# Altium PCB PCB1.PcbDoc
Units mil, origin at the board's own origin, x right, y up, seen from the top; angles counter-clockwise.
Board outline 6130 x 1505 mil, 2 copper layers (Top Layer, Bottom Layer); 51 components, 39 nets, 158 pads, 13 vias.
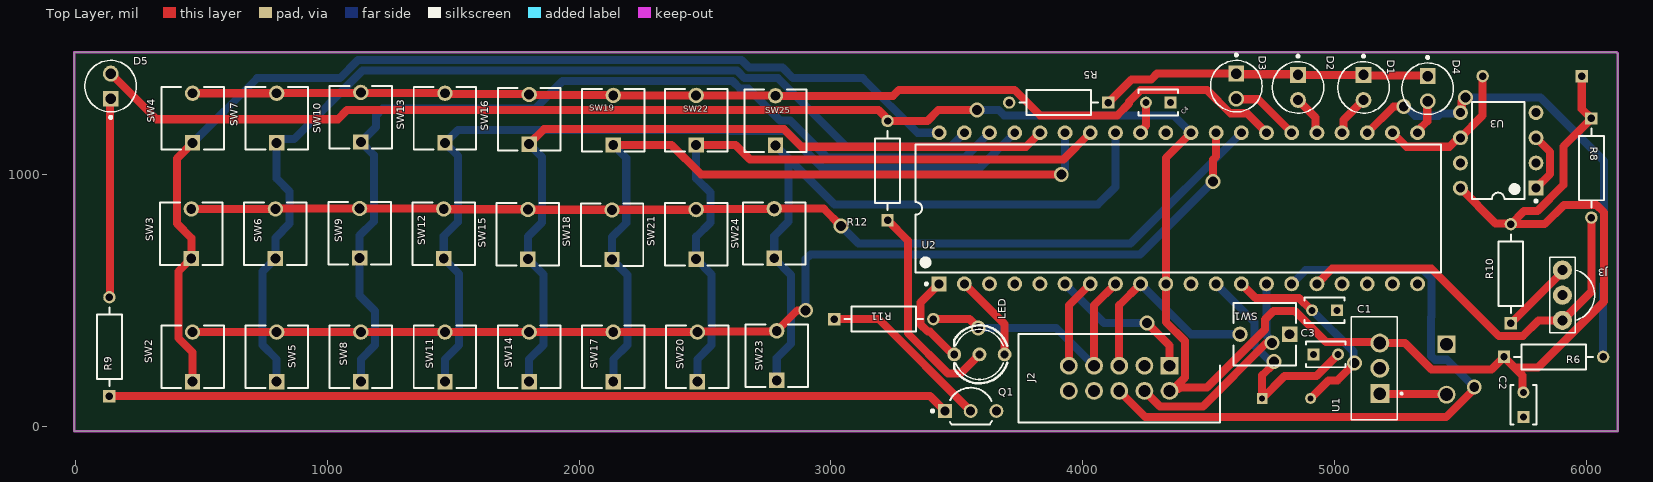
[diagram p0: Top Layer view]
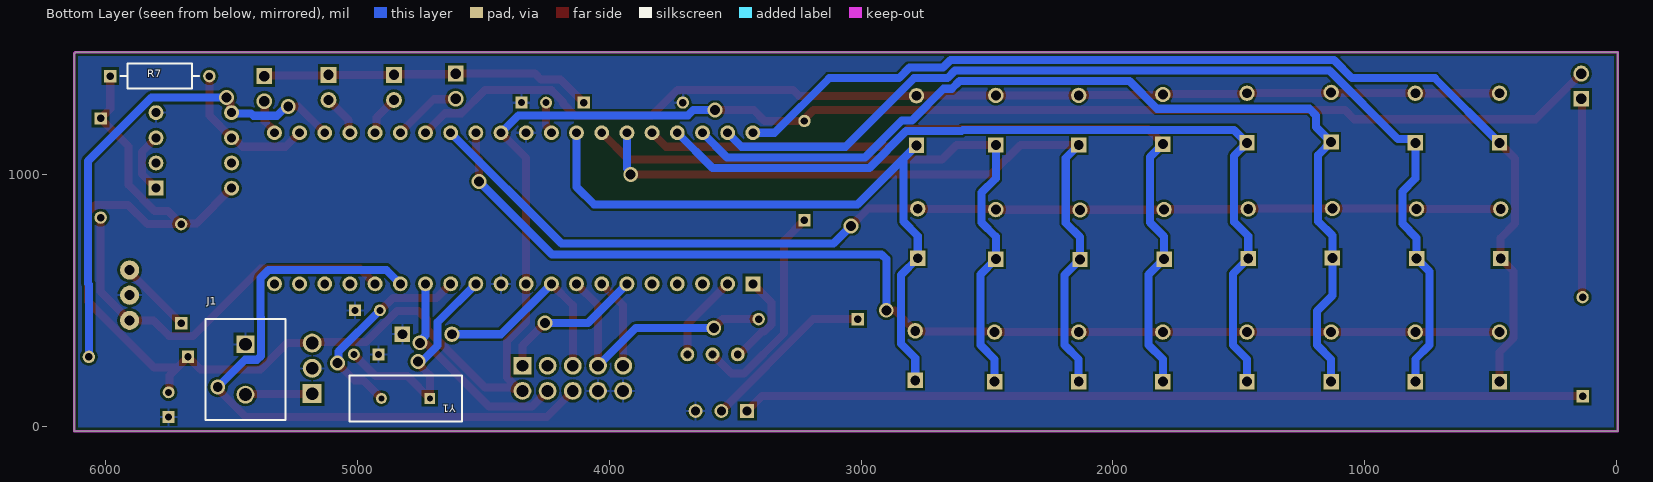
[diagram p1: Bottom Layer view, seen from below]
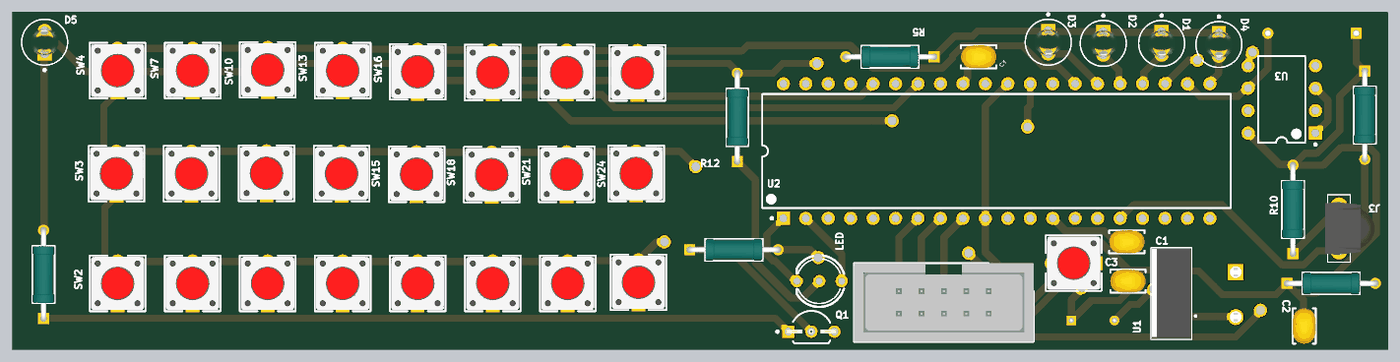
[diagram p2: 3D render of the assembled board from above, using the file's embedded part models]
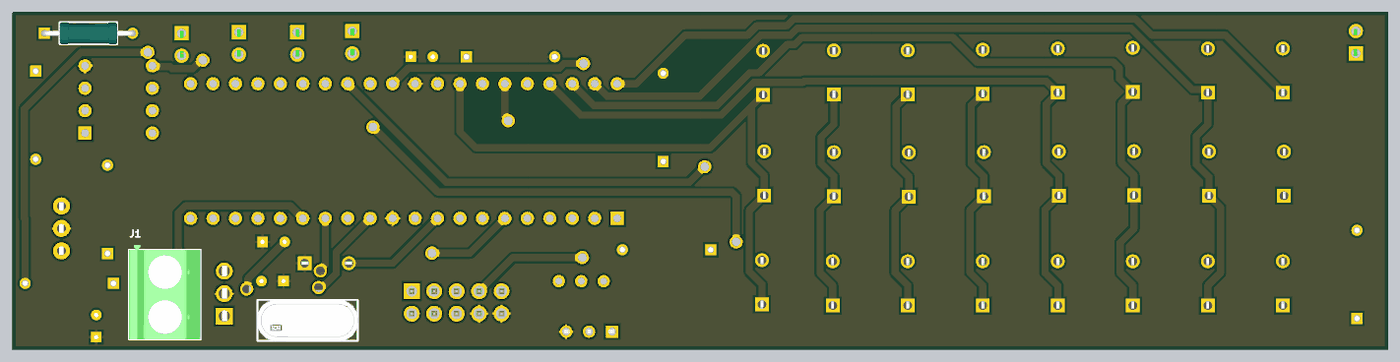
[diagram p3: 3D render of the assembled board from below, using the file's embedded part models]

## Layer stack, top to bottom
Top Solder: solder mask 0.4, Solder Resist, Dk 3.5
Top Layer: signal copper 1.4
Dielectric 1: dielectric 12.6, FR-4, Dk 4.8
Bottom Layer: signal copper 1.4
Bottom Solder: solder mask 0.4, Solder Resist, Dk 3.5

## Board outline
-5,-20 -5,1485 6120,1485 6125,1480 6125,-20

## Design rules (kind name [scope] priority, off if disabled: settings)
Clearance "My New Polygon" [InNamedPolygon('NONET_L01_P001')] p1: gap=10 ignorepadtopadclearanceinfootprint=FALSE
Clearance "Polygon NRule" [InNamedPolygon('NONET_L01_P000')] p2: gap=10 ignorepadtopadclearanceinfootprint=FALSE
Clearance [All] p3: gap=10 ignorepadtopadclearanceinfootprint=FALSE except(11.82: Arc-Via Track-Via; 15.8: Via-Via)
HoleSize [All] p1: absolutevalues=TRUE maxlimit=315 minlimit=7.87 maxpercent=80.000 minpercent=20.000
MinimumSolderMaskSliver [All] p1: minsoldermaskwidth=3
PolygonConnect [All] p1: connectstyle=Relief reliefconductorwidth=10 reliefentries=4 polygonreliefangle="90 Angle" airgapwidth=10
RoutingVias [All] p1: holewidth=23.7 width=47.3 viastyle="Through Hole" minholewidth=39.4 minwidth=59.1 maxholewidth=23.7 maxwidth=47.3
SilkToSilkClearance [All] p1: silktosilkclearance=3
SilkToSolderMaskClearance [IsPad] p1: minsilkscreentomaskgap=2 clearancetoexposedcopper=TRUE
SolderMaskExpansion [All] p1: expansion=4 istentingtop=FALSE
Width [All] p1: maxlimit=32 minlimit=16 preferedwidth=18 minimp=50.000000 maximp=50.000000 favimp=50.000000
26 further rules are at their usual default settings.

## Components (designator, comment, footprint, x,y, rotation, side; value= is the part's Value field where it differs from the comment)
C1 "K103K15X7RF5TL2" FP-K155L2-MFG 4960,460 r180 top
C2 "K103K15X7RF5TL2" FP-K155L2-MFG 5750,85 r90 top
C3 "K103K15X7RF5TL2" FP-K155L2-MFG 4965,285 r0 top
C4 "K103K15X7RF5TL2" FP-K155L2-MFG 4300,1285 r180 top
D1 "TLLG4401" FP-6_544-5255_01-4-MFG 5115,1345 r270 top
D2 "TLLG4401" FP-6_544-5255_01-4-MFG 4855,1345 r270 top
D3 "TLLG4401" FP-6_544-5255_01-4-MFG 4610,1350 r270 top
D4 "TLLG4401" FP-6_544-5255_01-4-MFG 5370,1340 r270 top
D5 "TLLG4401" FP-6_544-5255_01-4-MFG 140,1350 r90 top
J1 "1729128" PHOE-1729128-2_V 5445,225 r270 bottom
J2 "USBASP Connector" SHDR10W99P254_2X5_2032X889X927P 4345,240 r180 top
J3 "TSOP1838" TSOP1838 5905,520 r90 top
LED "L-59EGW-CA" L-59EGW-CA 3590,285 r90 top
Q1 "BC547BRL1G" ONSC-TO-92-3-29-11_AM_BL 3555,60 r0 top
R5 "MRS25000C1001FCT00" FP-MRS25-MFG 3905,1285 r180 top
R6 "MRS25000C1001FCT00" FP-MRS25-MFG 5870,275 r0 top
R7 "MRS25000C1001FCT00" FP-MRS25-MFG 5785,1390 r180 bottom
R8 "MRS25000C1001FCT00" FP-MRS25-MFG 6020,1025 r270 top
R9 "MRS25000C1001FCT00" FP-MRS25-MFG 135,315 r90 top
R10 "MRS25000C1001FCT00" FP-MRS25-MFG 5700,605 r90 top
R11 "MRS25000C1001FCT00" FP-MRS25-MFG 3210,425 r0 top
R12 "MRS25000C1001FCT00" FP-MRS25-MFG 3225,1015 r90 top
SW1 "EVQ-21505R" FP-EVQ-21505R-MFG 4723.43,365 r180 top
SW2 "EVQ-21505R" FP-EVQ-21505R-MFG 465,275 r90 top
SW3 "EVQ-21505R" FP-EVQ-21505R-MFG 460,764.21 r90 top
SW4 "EVQ-21505R" FP-EVQ-21505R-MFG 465,1223.43 r90 top
SW5 "EVQ-21505R" FP-EVQ-21505R-MFG 799.17,275 r90 top
SW6 "EVQ-21505R" FP-EVQ-21505R-MFG 794.17,764.21 r90 top
SW7 "EVQ-21505R" FP-EVQ-21505R-MFG 799.17,1223.43 r90 top
SW8 "EVQ-21505R" FP-EVQ-21505R-MFG 1133.33,275 r90 top
SW9 "EVQ-21505R" FP-EVQ-21505R-MFG 1128.33,765.93 r90 top
SW10 "EVQ-21505R" FP-EVQ-21505R-MFG 1133.33,1226.85 r90 top
SW11 "EVQ-21505R" FP-EVQ-21505R-MFG 1467.5,275 r90 top
SW12 "EVQ-21505R" FP-EVQ-21505R-MFG 1462.5,764.21 r90 top
SW13 "EVQ-21505R" FP-EVQ-21505R-MFG 1467.5,1223.43 r90 top
SW14 "EVQ-21505R" FP-EVQ-21505R-MFG 1801.67,275 r90 top
SW15 "EVQ-21505R" FP-EVQ-21505R-MFG 1796.67,761.71 r90 top
SW16 "EVQ-21505R" FP-EVQ-21505R-MFG 1801.67,1218.43 r90 top
SW17 "EVQ-21505R" FP-EVQ-21505R-MFG 2135.83,275 r90 top
SW18 "EVQ-21505R" FP-EVQ-21505R-MFG 2130.83,760 r90 top
SW19 "EVQ-21505R" FP-EVQ-21505R-MFG 2135.83,1215 r90 top
SW20 "EVQ-21505R" FP-EVQ-21505R-MFG 2470,275 r90 top
SW21 "EVQ-21505R" FP-EVQ-21505R-MFG 2465.01,761.57 r90 top
SW22 "EVQ-21505R" FP-EVQ-21505R-MFG 2465.01,1215 r90 top
SW23 "EVQ-21505R" FP-EVQ-21505R-MFG 2785.01,280 r90 top
SW24 "EVQ-21505R" FP-EVQ-21505R-MFG 2775.01,765 r90 top
SW25 "EVQ-21505R" FP-EVQ-21505R-MFG 2780.01,1213.43 r90 top
U1 "L7805CV" TO255P1040X460X1968-3 5180,129.21 r90 top
U2 "ATmega32A-PU" 40P6 4380,865 r90 top
U3 "24C01C-I/P" PDIP300-P8 5650,1095 r180 top
Y1 "ECS-80-20-4X" FP-ECS-80-20-4X-MFG 4808.94,110 r0 bottom

## Footprints (in the part's own frame and the unit in brackets; to place one, negate y for a bottom-side part, rotate by r counter-clockwise, add the part's x,y. Pads: shape width x height; smd on the part's side, far side on the other; paste and mask are expansions set on the pad)
40P6 [mm] "40-Pin Ceramic Dual In-Line Package (CerDIP)"
  rect 1.5x1.5 hole 0.9: 1(-7.62,24.13)
  round 1.5 hole 0.9: 2(-7.62,21.59) 3(-7.62,19.05) 4(-7.62,16.51) 5(-7.62,13.97) 6(-7.62,11.43) 7(-7.62,8.89) 8(-7.62,6.35) 9(-7.62,3.81) 10(-7.62,1.27) 11(-7.62,-1.27) 12(-7.62,-3.81) 13(-7.62,-6.35) 14(-7.62,-8.89) 15(-7.62,-11.43) 16(-7.62,-13.97) 17(-7.62,-16.51) 18(-7.62,-19.05) 19(-7.62,-21.59) 20(-7.62,-24.13) 21(7.62,-24.13) 22(7.62,-21.59) 23(7.62,-19.05) 24(7.62,-16.51) 25(7.62,-13.97) 26(7.62,-11.43) 27(7.62,-8.89) 28(7.62,-6.35) 29(7.62,-3.81) 30(7.62,-1.27) 31(7.62,1.27) 32(7.62,3.81) 33(7.62,6.35) 34(7.62,8.89) 35(7.62,11.43) 36(7.62,13.97) 37(7.62,16.51) 38(7.62,19.05) 39(7.62,21.59) 40(7.62,24.13)
  silkscreen extent -7.74,-26.5 6.45,26.5, body extent -7.05,-26.47 7.05,26.47, height 5.72
FP-6_544-5255_01-4-MFG [mm]
  rect 1.6x1.6 hole 1.05 paste-2539.97 mask+0: 1(-1.27,0)
  round 1.6 hole 1.05 paste-2539.97 mask+0: 2(1.27,0)
  silkscreen extent -3.27,-2.6 2.6,2.6, body extent -2.32,-2.32 2.32,2.32, height 0.25
FP-ECS-80-20-4X-MFG [mm]
  rect 1.1x1.1 hole 0.6 paste-2539.97 mask+0: 1(-2.44,0)
  round 1.1 hole 0.6 paste-2539.97 mask+0: 2(2.44,0)
  silkscreen extent -5.68,-2.33 5.68,2.33, body extent -5.68,-2.32 5.68,2.32, height 3.5
FP-EVQ-21505R-MFG [mm]
  rect 1.55x1.55 hole 1 paste-2539.97 mask+0: A(-2.5,0)
  round 1.55 hole 1 paste-2539.97 mask+0: B(2.5,0)
  silkscreen extent -3.15,-3.15 3.15,3.15, body extent -3.37,-3.25 3.37,3.25, height 0.25
FP-K155L2-MFG [mm]
  rect 1.2x1.2 hole 0.7 paste-2539.97 mask+0: 1(-1.25,0)
  round 1.2 hole 0.7 paste-2539.97 mask+0: 2(1.25,0)
  silkscreen extent -2,-1.3 2,1.3, body extent -2.1,-1.4 2.1,1.4, height 0.25
FP-MRS25-MFG [mm]
  rect 1.25x1.25 hole 0.75 paste-2539.97 mask+0: 1(-5,0)
  round 1.25 hole 0.75 paste-2539.97 mask+0: 2(5,0)
  silkscreen extent -3.97,-1.25 3.98,1.25, body extent -5.72,-1.35 5.72,1.35, height 0.25
L-59EGW-CA [mm]
  round 1.4 hole 0.8: 1(0,2.54) 2(0,0) 3(0,-2.54)
  silkscreen extent -2.92,-2.8 2.92,2.54
ONSC-TO-92-3-29-11_AM_BL [mm] "TO, 3-Leads, Body Dia 4.7mm, Pitch 2.6mm"
  rect 1.4x1.4 hole 0.9: 1(-2.6,0)
  round 1.4 hole 0.9: 2(0,0) 3(2.6,0)
  silkscreen extent -3.97,-1.34 2.13,2.35, body extent -2.84,-1.34 2.84,2.35, height 5.33
PDIP300-P8 [mm] "8-Pin Plastic Dual In-Line Package (PDIP)"
  rect 1.5x1.5 hole 0.9: 1(-3.81,3.81)
  round 1.5 hole 0.9: 2(-3.81,1.27) 3(-3.81,-1.27) 4(-3.81,-3.81) 5(3.81,-3.81) 6(3.81,-1.27) 7(3.81,1.27) 8(3.81,3.81)
  silkscreen extent -3.94,-4.9 2.65,5.23, body extent -3.55,-4.9 3.55,4.9, height 4.32
PHOE-1729128-2_V [mm] "Receptacle, 2-Leads, Body 8.1x10.16mm, Pitch 5.08mm"
  rect 1.8x1.8 hole 1.3: 1(-2.54,0)
  round 1.8 hole 1.3: 2(2.54,0)
  silkscreen extent -5.08,-4.05 5.08,4.05, body extent -5.65,-4.05 5.08,4.05, height 10.01
SHDR10W99P254_2X5_2032X889X927P [mm]
  rect 1.8x1.8 hole 1.2: 1(0,0)
  round 1.8 hole 1.2: 2(0,2.54) 3(2.54,0) 4(2.54,2.54) 5(5.08,0) 6(5.08,2.54) 7(7.62,0) 8(7.62,2.54) 9(10.16,0) 10(10.16,2.54)
  silkscreen extent -5.08,-3.17 15.24,5.72, body extent -5.08,-3.18 15.24,5.72, height 9.27
TO255P1040X460X1968-3 [mm]
  rect 1.91x1.91 / inner round 1.91 / far side rect 1.91x1.91 hole 1.27: 1(0,0)
  round 1.91 hole 1.27: 2(2.55,0) 3(5.1,0)
  silkscreen extent -2.65,-2.29 7.75,2.86, body extent -2.35,-1.71 7.62,2.73, height 19.68
TSOP1838 [mil]
  round 76 hole 39.37: 1(-100,0) 2(0,0) 3(100,0)
  silkscreen extent -150,-128 150,50, body extent -118,-159 118,61, height 404

## Part data
C1 C3: library part CMP-00030-39474934-1, "K103K15X7RF5TL2 Multilayer Ceramic Capacitor, 0.01 uF, 50 V, ± 10%, X7R, Radial Leaded (10P)", Capacitance=10nF, Case/Package=Dipped, Dielectric=X7R, Dielectric Material=Ceramic, Max Operating Temperature=125°C, Min Operating Temperature=-55°C, Tolerance=10%, Voltage=50V, Depth=2.6mm, Diameter=500µm, Height=4mm, Height - Seated (Max)=5.588mm, Lead Diameter=500µm, Lead Free="Lead Free", Lead Length=30mm, Lead Pitch=2.5mm, Lead/Base Style=Straight, Length=4mm, Mount="PCB, Through Hole", NexarPartId=39474934, Number of Pins=2, Packaging="Cut Tape", Radiation Hardening=No, REACH SVHC=Unknown, RoHS=Compliant, Schedule B=8532240060, Termination=Radial, Thickness=2.6mm, Voltage Rating=50V, Voltage Rating (DC)=50V, Weight=160.004709mg, Width=2.5mm
C2 C4: library part CMP-00030-39474934-1, "K103K15X7RF5TL2 Multilayer Ceramic Capacitor, 0.01 uF, 50 V, ± 10%, X7R, Radial Leaded", Capacitance=10nF, Case/Package=Dipped, Dielectric=X7R, Dielectric Material=Ceramic, Max Operating Temperature=125°C, Min Operating Temperature=-55°C, Tolerance=10%, Voltage=50V, Depth=2.6mm, Diameter=500µm, Height=4mm, Height - Seated (Max)=5.588mm, Lead Diameter=500µm, Lead Free="Lead Free", Lead Length=30mm, Lead Pitch=2.5mm, Lead/Base Style=Straight, Length=4mm, Mount="PCB, Through Hole", NexarPartId=39474934, Number of Pins=2, Packaging="Cut Tape", Radiation Hardening=No, REACH SVHC=Unknown, RoHS=Compliant, Schedule B=8532240060, Termination=Radial, Thickness=2.6mm, Voltage Rating=50V, Voltage Rating (DC)=50V, Weight=160.004709mg, Width=2.5mm
D1 D2 D3 D4 D5: library part CMP-00030-39390728-1, "TLLG4401 LED, Green, 2mcd, 3mmDia., T-1, +/-25deg, 565nm, 7mA, 1.9V Vf, 20V Vr, 20mW, -40", Ambient Temperature Range High=100°C, Case/Package=Radial, Color=Green, Forward Current=2mA, Forward Voltage=1.9V, Min Operating Temperature=-40°C, Power Dissipation=20mW, Reverse Voltage=6V, Voltage Rating (DC)=2.4V, Depth=3.2mm, Dominant Wavelength=575nm, Height=4.5mm, Illumination Color=Green, Lead Free="Lead Free", Lead Length=23mm, Length=3.2mm, Lens Color=Green, Lens Style="Circular, Colored, Diffused, Dome, Round, Tinted", Lens Transparency=Diffused, Luminous Intensity=2mcd, Max Junction Temperature (Tj)=100°C, Max Operating Temperature=100°C, Mount="Through Hole", NexarPartId=39390728, Number of Elements=1, Number of LEDs=1, Number of Pins=2, Packaging=Bulk, Peak Wavelength=565nm, Radiation Hardening=No, REACH SVHC=Unknown, RoHS=Compliant, Schedule B="8541402000, 8541402000", Test Current=2mA, Viewing Angle=25°, Wavelength=575nm
J1: library part CMP-2000-05815-1, "Header of  Input Batt", Current Rating=13500mA, Manufacturer="Phoenix Contact", Package Description="2-Pin Through Hole Device, Body 8.1 x 10.16 mm, Pitch 5.08 mm", Package Reference=1729128-2, Package Version=03/2015, Voltage Rating=400V, Datasheet URL=https://datasheet.ciiva.com/16046/1729128-16046181.pdf, Datasheet Version=12/2013, Manufacturer URL=http://www.phoenixcontact.com/, Mounting Technology=ThroughHole, No. of Positions=2, No. of Rows=1, Orientation=Horizontal, Package URL=https://www.phoenixcontact.com/online/portal/pi/pxc/product_detail_page/!ut/p/b1/3VdJjqNKFDxLH8AFycySyWY2ozFsEPOMMQaDOX1XedGL_1Vdm5YXJleknhSKeBkvI6EA8ncAo3AYoDhBQGco6KN7VURTdemj9us_IEKEZo_YHiPAEWEFmDGOHMORkqKYCORBZxgL7ZoaZYcbFFUZ3fqxSY6GOuxydWUuHqz1ynmMFygu583Bob0Ewr6Sd_l-5m-kAueHiB0jpRwZwe58wwtkpxtMYd_LmGcDRU02dRNEyWt6Y2ti5pSyJ_reIkzIulrqApdnbT11V5jnCKbYNCvhEM1MCpPByat_X379-iThf08CI5GfOPqfBeS3BRoBOdD55AKVv0iLwCMq-2BrzXWSGRH7pUGD9uwXQjiph3xL0DKQwdGa0JImiIOmBNOestqgwTHSSs2oOep-78apyXQBvNi8ZLaFjvjWvcaUEBu0MC6Wbe-d6mB0FAebo2lUWinqYaZs5DAYzV0RP9yitUjnGJ0iI9xhZkT42OCQNUJJhkgWINNQLP2JFP6OpMg3JCVg70jqHT0lvKOnhHf0lPuOnnLf0VPuWx6_dxwUIvwk5WMkT0kLL1mh61l2yZVSzG3pYV_bqo-mj6uMKwKwdnnW8Jh5RTOJzMOA5c-eJDaZQw4mTMPH02PvS_ZAqNVjVTo2WyYLkwH_KU1mmmG5kjRhDqPXLwwVHvVOjCM60-fpXvTDfMGW1PVFVS1r4e4yVDk4ZdNbkUHvqPqQSeian4UD39fNKmachqdJ1NJbyk8rXT9mXTvPk3oE5meulKGgiruPJek-4I9hTT6G8ZLOyRSm2RRVbThERQad5OS28hdt4YW4vG0stgYYzsWsK4_7y6DZMjJSCqri1kyiZR5vD7pwIrNR7QwPHTcLTI5qT7eRlpHrdGiupYlqQDJ7zy_CND8fWWBoLRXxk1RVcXiBQwbTD4Xi7KL-FuO94t9xaqweXzH, Packing=Bulk, PartNumber=1729128, Pitch=5.08mm, RoHS=TRUE
J2: "Connector", Manufacturer_Name=Molex, Manufacturer_Part_Number=70246-1001, Mouser Part Number=538-70246-1001, Datasheet Link=http://www.molex.com/pdm_docs/sd/702461001_sd.pdf, Height=9.27mm, Mouser Price/Stock=https://www.mouser.co.uk/ProductDetail/Molex/70246-1001?qs=L7RdmAxh%252BcP9d7Ope9dnAA%3D%3D
J3: "IR Remote Receiver 38KHz 35m 3-Pin", Package=None, Check_prices=https://www.snapeda.com/parts/TSOP1838/Vishay/view-part/?ref=eda, MF=Vishay, MP=TSOP1838, SnapEDA_Link=https://www.snapeda.com/parts/TSOP1838/Vishay/view-part/?ref=snap
LED: "LED; 5mm; bicolour; red/green; 5mcd; 5mcd; 60Â°; Front: convex; anode", Package=None, Availability=Unavailable, MF=Kingbright, MP=L-59EGW-CA, Price=None, SnapEDA_Link=https://www.snapeda.com/parts/L-59EGW-CA/Kingbright/view-part/885747/?ref=snap
Q1: library part CMP-1048-01605-1, "Amplifier Transistor, NPN Silicon, 3-Pin TO-92, Pb-Free, Tape and Reel", Manufacturer="On Semiconductor", ComponentLink1Description="Manufacturer URL", ComponentLink1URL=http://www.onsemi.com/, ComponentLink2Description=Datasheet, ComponentLink2URL=http://www.onsemi.com/pub_link/Collateral/BC546-D.PDF, ComponentLink3Description="Package Specification", ComponentLink3URL=http://www.onsemi.com/pub_link/Collateral/MAC97-D.PDF, DatasheetVersion="Rev. 7", fT Min (MHz)=150, IC Continuous (A)=0.1, Mounting Technology="Through Hole", PackageDescription="3-Pin Transistor Outline, Body 4.825 x 3.685 mm, Pitch 1.27 mm", PackageReference=TO-92-3-29-11_AM_BL, PackageVersion="Rev. AM", Packing="Tape and Reel", PartNumber=BC547BRL1G, Polarity=NPN, RoHS=TRUE
R5 R6 R7 R8 R11 R12: library part CMP-02408-000051-1, "RES 1K OHM 0.6W 1% AXIAL", Case/Package=Axial, Max Operating Temperature=155°C, Max Power Dissipation=600mW, Min Operating Temperature=-55°C, Package Quantity=5000, Resistance=1kR, Resistance Tolerance=1%, Resistor Type="Metal Film", Temperature Coefficient=50ppm/°C, Voltage Rating=350V, Construction=Cylindrical, Contact Plating=Tin, Diameter=2.5mm, Lead Diameter=0.6mm, Lead Free="Lead Free", Length=6.5mm, Military Standard=Not, Mount="Through Hole", Number of Pins=2, Number of Terminations=2, Packaging="Tape and Reel", Power Rating=600mW, Radiation Hardening=No, RoHS Compliant=Yes, Series=MRS25, Technology="THIN FILM", Termination=Axial, Tolerance=1%, Voltage Rating (DC)=350V, Weight=0.00776oz, Width=2.5mm
R9 R10: library part CMP-02408-000051-1, "RES 100 OHM 0.6W 1% AXIAL", Case/Package=Axial, Max Operating Temperature=155°C, Max Power Dissipation=600mW, Min Operating Temperature=-55°C, Package Quantity=5000, Resistance=1kR, Resistance Tolerance=1%, Resistor Type="Metal Film", Temperature Coefficient=50ppm/°C, Voltage Rating=350V, Construction=Cylindrical, Contact Plating=Tin, Diameter=2.5mm, Lead Diameter=0.6mm, Lead Free="Lead Free", Length=6.5mm, Military Standard=Not, Mount="Through Hole", Number of Pins=2, Number of Terminations=2, Packaging="Tape and Reel", Power Rating=600mW, Radiation Hardening=No, RoHS Compliant=Yes, Series=MRS25, Technology="THIN FILM", Termination=Axial, Tolerance=1%, Voltage Rating (DC)=350V, Weight=0.00776oz, Width=2.5mm
SW1 SW2 SW3 SW4 SW5 SW6 SW7 SW8 SW9 SW10 SW11 SW12 SW13 SW14 SW15 SW16 SW17 SW18 SW19 SW20 SW21 SW22 SW23 SW24 SW25: library part CMP-05618-000118-1, "SWITCH TACTILE SPST-NO 0.02A 15V", Actuator Color=Red, Case/Package=Radial, Contact Current Rating=20mA, Contact Resistance=50mR, Max Operating Temperature=70°C, Max Voltage Rating (DC)=15V, Min Operating Temperature=-20°C, Operating Force=1.6N, Package Quantity=1, Actuator Length=1.6mm, Actuator Type=Standard, Contact Plating=Silver, Current Rating=20mA, Depth=6mm, Electrical Life=100000Cycles, Height=5mm, Illumination Type=Non-Illuminated, Lead Free="Lead Free", Length=6mm, Max Current Rating=20mA, Mechanical Life=100000Cycles, Mount="Through Hole", Orientation=Straight, Packaging="Tape and Reel", Series=EVQ2, Size=6mm, Switch Function=Off-Mom, Switch Travel=0.25mm, Termination="PC Pin", Throw Configuration=SPST, Voltage Rating (DC)=15V, Width=6mm
U1: "Linear Voltage Regulator IC Positive Fixed 1 Output 1.5A TO-220", Package="TO-220-3 ON Semiconductor", Availability="In Stock", Check_prices=https://www.snapeda.com/parts/L7805CV/STMicroelectronics/view-part/?ref=eda, MF=STMicroelectronics, MP=L7805CV, Price=None, Purchase-URL=https://pricing.snapeda.com/search/part/L7805CV/?ref=eda, SnapEDA_Link=https://www.snapeda.com/parts/L7805CV/STMicroelectronics/view-part/?ref=snap
U2: library part CMP-0095-00028-2, "8-bit AVR Microcontroller, 2.7-5.5V, 16MHz, 32KB Flash, 1KB EEPROM, 2KB SRAM, 40-pin PDIP, Industrial Grade (-40°C to 85°C)", Code_JEDEC=MS-011-AC, ComponentLink1Description="Manufacturer URL", ComponentLink1URL=http://www.atmel.com/, ComponentLink2Description="ATmega32A Datasheet", ComponentLink2URL=http://www.atmel.com/dyn/resources/prod_documents/doc8155.pdf, ComponentLink3Description="ATmega32A Summary", ComponentLink3URL=http://www.atmel.com/dyn/resources/prod_documents/8155S.pdf, DatasheetVersion="revC, Feb-2011", PackageDescription="40-lead (0.600\"/15.24mm Wide) Plastic Dual Inline Package (PDIP)", PackageReference=40P6, PackageVersion="revB, Sep-2001", RevisionNote="DatasheetVersion updated. URLs added."
U3: library part CMP-0159-00085-1, "1Kbit, 400kHz, 5V, I2C Serial EEPROM, 8-Pin PDIP, Industrial Temperature", Code_JEDEC=MS-001, DatasheetVersion="revJ, Aug-2008", PackageDescription="8-Lead Plastic Dual In-Line (P) - 300 mil Body [PDIP]", PackageReference=PDIP300-P8, PackageVersion="revBB, Aug-2009"
Y1: library part CMP-1669-00002-3, ESR (Equivalent Series Resistance)=80Ω, Frequency=8MHz, Frequency Stability=50ppm, Frequency Tolerance=0.003%, Load Capacitance=20pF, Max Operating Temperature=70°C, Min Operating Temperature=-10°C, Height=3.5mm, Lead Free="Lead Free", Length=11.3538mm, Mount="Through Hole", NexarPartId=316504, Number of Pins=49, Packaging=Bulk, RoHS=Compliant, Schedule B="8541600025, 8541600025", Termination=Radial, Tolerance=0.003%, Width=4.65mm

## Via types
v1: diameter 59.1, hole 39.4, Top Layer to Bottom Layer, 13 vias

## Nets (pads, with @x,y where several pads share a name; then routed paths per layer and width w, separated by ;. In a path a pad name is that pad's centre, name@x,y a point inside that pad or via, vN(x,y) a via of type N, cw(c..) or ccw(c..) an arc to the next point about the centre after c; other vN are vias at no path point)
COL1: SW2.B SW5.B SW8.B SW11.B SW14.B SW17.B SW20.B SW23.B U2.29 | length 4618
  Top Layer w32: SW2.B SW5.B SW8.B SW11.B SW14.B SW17.B SW20.B 2472.5,375.93 2782.51,375.93 SW23.B 2866.58,460 v1(2900,460) ; v1(4518.07,971.93) 4518.07,1058.07 4530,1070 U2.29
  Bottom Layer w32: v1(2900,460) 2900,663.23 2918.75,681.98 4228.11,681.98 v1(4518.07,971.93)
COL2: SW3.B SW6.B SW9.B SW12.B SW15.B SW18.B SW21.B SW24.B U2.28 | length 4414.6
  Top Layer w32: SW3.B SW6.B 795.02,863.49 1127.47,863.49 SW9.B 1129.19,863.49 1461.64,863.49 SW12.B 1463.75,861.39 1795.42,861.39 SW15.B 1797.52,859.28 2129.98,859.28 SW18.B 2131.62,859.21 2464.22,859.21 SW21.B 2466.72,861.71 2773.3,861.71 SW24.B 2971.57,863.43 v1(3040,795)
  Bottom Layer w32: v1(3040,795) 3109.69,725.31 4190.31,725.31 U2.28
COL3: SW4.B SW7.B SW10.B SW13.B SW16.B SW19.B SW22.B SW25.B U2.27 | length 4439.7
  Top Layer w32: SW4.B SW7.B 800.88,1323.56 1131.62,1323.56 SW10.B 1135.04,1323.56 1465.79,1323.56 SW13.B 1470,1319.35 1799.17,1319.35 SW16.B 1803.38,1315.14 2134.12,1315.14 SW19.B SW22.B 2465.8,1312.64 2779.22,1312.64 SW25.B 3246.61,1311.85 3270.36,1335.61 3729.11,1335.61 3830.32,1234.39 4137.23,1234.39 4183.73,1280.9 4183.73,1288.12 4230.23,1334.62 4494.07,1334.62 4586.18,1242.5 4652.5,1242.5 U2.27
GND: C1.1 C2.1 C3.1 C4.1 J1.1 J2.8 J2.10 J3.2 Q1.3 R5.2 SW1.A U1.2 U2.11 U2.31 U3.4
LED_G: LED.3 U2.2 | length 349.2
  Top Layer w32: U2.2 3535,565 3535,560 3690,405 LED.3
LED_R: LED.1 U2.1 | length 374.6
  Top Layer w32: U2.1 3356.24,491.24 3356.24,404.04 3385.28,375 3393.74,375 3483.74,285 LED.1
MISO: J2.9 U2.7 | length 360.2
  Top Layer w32: J2.9 3945,480 U2.7
MOSI: J2.1 U2.6 | length 596.5
  Top Layer w32: v1(4255,410) 4345,320 J2.1
  Bottom Layer w32: U2.6 4085,410 v1(4255,410)
NetC4_2: C4.2 U2.32 | length 128.6
  Top Layer w32: U2.32 4230,1172.32 4250.79,1193.11 C4.2
NetD1_1: D1.1 D2.1 D3.1 D4.1 R5.1 | length 1319.9
  Top Layer w32: R5.1 4193.47,1376.62 4272.23,1376.62 4295.61,1400 D3.1 4612.5,1397.5 4852.5,1397.5 D2.1 D1.1 5117.5,1392.5 5367.5,1392.5 D4.1
NetD5_1: D5.1 R9.2 | length 790.2
  Top Layer w32: R9.2 137.5,514.35 137.5,1297.5 D5.1
NetJ1_2: J1.2 U1.1 | length 266.7
  Top Layer w32: U1.1 5182.11,127.11 5442.89,127.11 J1.2
NetJ3_3: J3.3 R10.1 | length 296.8
  Top Layer w32: R10.1 5905,613.15 J3.3
NetLED_2: LED.2 R12.1 | length 864.2
  Top Layer w32: R12.1 3305.4,737.75 3305.4,368.99 3464.7,209.7 3514.7,209.7 LED.2
NetQ1_1: Q1.1 R9.1 | length 3341.1
  Top Layer w32: R9.1@136.13,119.28 3393.36,119.28 Q1.1
NetQ1_2: Q1.2 R11.1 | length 693
  Top Layer w32: R11.1 3190,425 Q1.2
NetU3_1: U3.1 U3.3 | length 246
  Top Layer w32: U3.1 5855.53,1000.53 5855.53,1089.47 U3.3
RECEIVE: J3.1 R8.2 U2.16 | length 1592.3
  Top Layer w32: U2.16 4990,625 5385,625 5652.46,357.54 5747.63,357.54 5810.09,420 J3.1 6020,535 R8.2
RESET: J2.5 SW1.B U2.9 | length 838.1
  Top Layer w32: J2.5 4145,480 U2.9
  Bottom Layer w32: U2.9 4430,365 SW1.B
ROW1: SW2.A SW3.A SW4.A U2.40 | length 4263
  Top Layer w32: SW2.A 465,293.51 408.49,350.02 408.49,614.28 SW3.A 460,747.66 403.49,804.17 403.49,1063.49 SW4.A
  Bottom Layer w32: SW4.A 721.79,1381.79 1050.53,1381.79 1122.74,1454 2644.58,1454 2674.79,1423.79 2807.39,1423.79 2849.39,1381.79 3126.63,1381.79 3343.42,1165 U2.40
ROW2: SW5.A SW6.A SW7.A U2.39 | length 4035.9
  Bottom Layer w32: SW5.A 799.17,265.7 742.65,322.22 742.65,614.27 SW6.A 794.17,747.66 850.68,804.17 850.68,931.57 799.17,983.09 SW7.A 813.68,1139.51 867.65,1139.51 1140.14,1412 2627.18,1412 2657.4,1381.79 2789.99,1381.79 3062.31,1109.47 3474.47,1109.47 U2.39
ROW3: SW8.A SW9.A SW10.A U2.38 | length 3834.6
  Bottom Layer w32: SW8.A 1133.33,265.7 1189.84,322.22 1189.84,456.85 1128.33,518.36 SW9.A 1128.33,756.63 1184.84,813.14 1184.84,1076.91 SW10.A 1193.1,1188.19 1193.1,1233.78 1219.66,1260.34 1825.07,1260.34 1934.73,1370 2609.79,1370 2640,1339.79 2672.15,1339.79 2798.43,1213.51 2838.69,1213.51 2984.73,1067.47 3532.47,1067.47 U2.38
ROW4: SW11.A SW12.A SW13.A U2.37 | length 3446.3
  Bottom Layer w32: SW11.A 1467.5,265.7 1524.01,322.22 1524.01,604.27 SW12.A 1462.5,754.92 1519.01,811.43 1519.01,1073.49 SW13.A 1519.01,1176.51 2596.25,1176.51 2601.25,1171.51 2821.29,1171.51 2967.33,1025.47 3590.47,1025.47 U2.37
ROW5: SW14.A SW15.A SW16.A U2.36 | length 3142.3
  Top Layer w32: SW16.A 1861.43,1179.77 2813.03,1179.77 2883.33,1109.47 3774.47,1109.47 U2.36
  Bottom Layer w32: SW14.A 1801.67,265.7 1858.18,322.22 1858.18,601.77 SW15.A 1796.67,752.42 1853.18,808.93 1853.18,1068.49 SW16.A
ROW6: SW17.A SW18.A SW19.A U2.35 | length 3032.3
  Top Layer w32: SW19.A 2367.21,1116.57 2483.79,1000 v1(3915,1000)
  Bottom Layer w32: SW17.A 2135.83,265.7 2192.34,322.22 2192.34,600.06 SW18.A 2130.83,750.7 2187.34,807.22 2187.34,1065.06 SW19.A ; v1(3915,1000) 3915,1007.33 3930,1022.33 U2.35
ROW7: SW20.A SW21.A SW22.A U2.34 | length 2668.9
  Top Layer w32: SW22.A 2621.36,1116.57 2679.45,1058.49 3923.49,1058.49 U2.34
  Bottom Layer w32: SW22.A 2465.01,983.68 2521.52,927.17 2521.52,808.79 2465.01,752.28 SW21.A 2526.51,601.64 2526.51,322.22 2470,265.7 SW20.A
ROW8: SW23.A SW24.A SW25.A U2.33 | length 2647.6
  Bottom Layer w32: SW25.A 2831.52,1063.49 ; SW23.A 2785.01,270.7 2841.52,327.22 2841.52,600.06 SW24.A 2775.01,755.7 2831.52,812.22 2831.52,1063.49 ; U2.33 4130,950 4060,880 3015.01,880 2831.52,1063.49
RX: J2.4 U2.14 | length 880.1
  Top Layer w32: J2.4 4306.43,78.57 4477.88,78.57 4730.22,330.9 v1(4751.95,330.9)
  Bottom Layer w32: U2.14 4730,360.19 4751.95,338.23 v1(4751.95,330.9)
SCK: J2.7 R11.2 U2.8 | length 1075
  Top Layer w32: R11.2 3550,425 v1(3585,390) ; J2.7 4045,480 U2.8
  Bottom Layer w32: v1(3585,390) 3895,390 J2.7
SCL: R7.2 U2.22 U3.6 | length 589.2
  Top Layer w32: U2.22 5285.53,1109.47 5457.15,1109.47 5492.68,1145 U3.6 5588.15,1233.15 R7.2
SDA: R6.2 U2.23 U3.5 | length 1937
  Top Layer w32: U2.23 5235,1270 v1(5275,1270) ; U3.5 5505.18,1250.18 5505.18,1290.18 v1(5520,1305)
  Bottom Layer w32: v1(5275,1270) 5282.33,1270 5319.83,1232.5 5413.18,1232.5 5422.47,1241.79 5496.79,1241.79 U3.5 ; v1(5520,1305) 5818.53,1305 6070.61,1052.92 6070.61,566.26 6066.85,562.51 R6.2
SEL1: D1.2 U2.24 | length 165.2
  Top Layer w32: U2.24 5035.18,1170.18 5035.18,1215.18 D1.2
SEL2: D2.2 U2.25 | length 161.1
  Top Layer w32: D2.2 4924.82,1225.18 4924.82,1170.18 U2.25
SEL3: D3.2 U2.26 | length 275.9
  Top Layer w32: D3.2 4611.82,1298.18 4696.82,1298.18 U2.26
SEL4: D4.2 U2.21 | length 141.6
  Top Layer w32: U2.21 5330,1172.32 5368.18,1210.5 5368.18,1288.18 D4.2
TX: J2.6 U2.15 | length 2630.7
  Top Layer w32: J2.6 4248.43,36.57 5443.45,36.57 5555,148.12 v1(5555,155)
  Bottom Layer w32: U2.15 4885.53,620.53 5353,620.53 5385.53,588 5385.53,434.38 5383.57,432.42 5383.57,278.8 5398.8,263.57 5446.43,263.57 v1(5555,155)
VCC: C2.2 D5.2 J2.2 R6.1 R7.1 R8.1 R10.2 R12.2 U1.3 U2.10 U2.30 U3.8 | length 9599.3
  Top Layer w32: D5.2 321.29,1218.71 1042.46,1218.71 1078.75,1255 3188.79,1255 3216.39,1227.4 3216.39,1225.11 3225,1216.51 R12.2 3383.25,1211.85 3426.4,1255 v1(3580,1255) ; J2.2 4352.64,140 J2.2@4360.07,147.44 ; U2.30 4330,1065 U2.10 4330,413.95 4406.43,337.52 4406.43,193.8 J2.2@4360.07,147.44 ; U3.8 5639.86,805.14 5696.71,805.14 R10.2 ; C2.2 5747.08,137.13 5747.08,201.07 5715.15,233 ; R7.1 5981.85,1260 R8.1 5908.57,1110.42 5908.57,957.75 5805.75,854.92 5753.07,854.92 R10.2 ; J2.2@4360.07,147.44 4379.92,147.44 4386.48,154 4493.92,154 4723.34,383.42 4723.34,423.68 4757.13,457.47 4843.14,457.47 4965.99,334.62 5175.38,334.62 U1.3 5280,330 5385,225 5623.15,225 R6.1 5715.15,233 ; R10.2 5834.36,801.85 5911.26,878.76 6040.96,878.76 6070.61,849.11 6070.61,495.1 5808.51,233 5715.15,233
  Bottom Layer w32: v1(3580,1255) 3666.58,1255 3687.19,1234.39 4360.61,1234.39 U2.30
XTAL1: C1.2 U2.13 Y1.2 | length 837.4
  Top Layer w32: U2.13 4685.53,509.47 4858.97,509.47 4908.44,460 C1.2 ; Y1.2 4976.08,181.08 5011.08,181.08 v1(5080,250)
  Bottom Layer w32: C1.2 5074.81,295.97 5074.81,255.19 v1(5080,250)
XTAL2: C3.2 U2.12 Y1.1 | length 952.2
  Top Layer w32: v1(4759.97,256.43) 4759.97,249.1 4712.87,202 Y1.1 4801.74,198.87 4928.08,198.87 C3.2
  Bottom Layer w32: U2.12 4681.51,413.49 4681.51,320.21 4740.1,261.62 4754.78,261.62 v1(4759.97,256.43)
pads on no net: J2.3 U2.3 U2.4 U2.5 U2.17 U2.18 U2.19 U2.20 U3.2 U3.7

## Polygon pours and split planes (outlines as drawn)
GND on Bottom Layer "GND_L02_P001" (solid, remove dead copper, pour order 1): -5,-20 -5,1485 6120,1485 6125,1480 6125,-20

## Keep-outs
Keep-Out Layer:
  the board outline again, w10